# EAGLE board Schematic_328programmer_v0.2 (EAGLE 7.6.0)
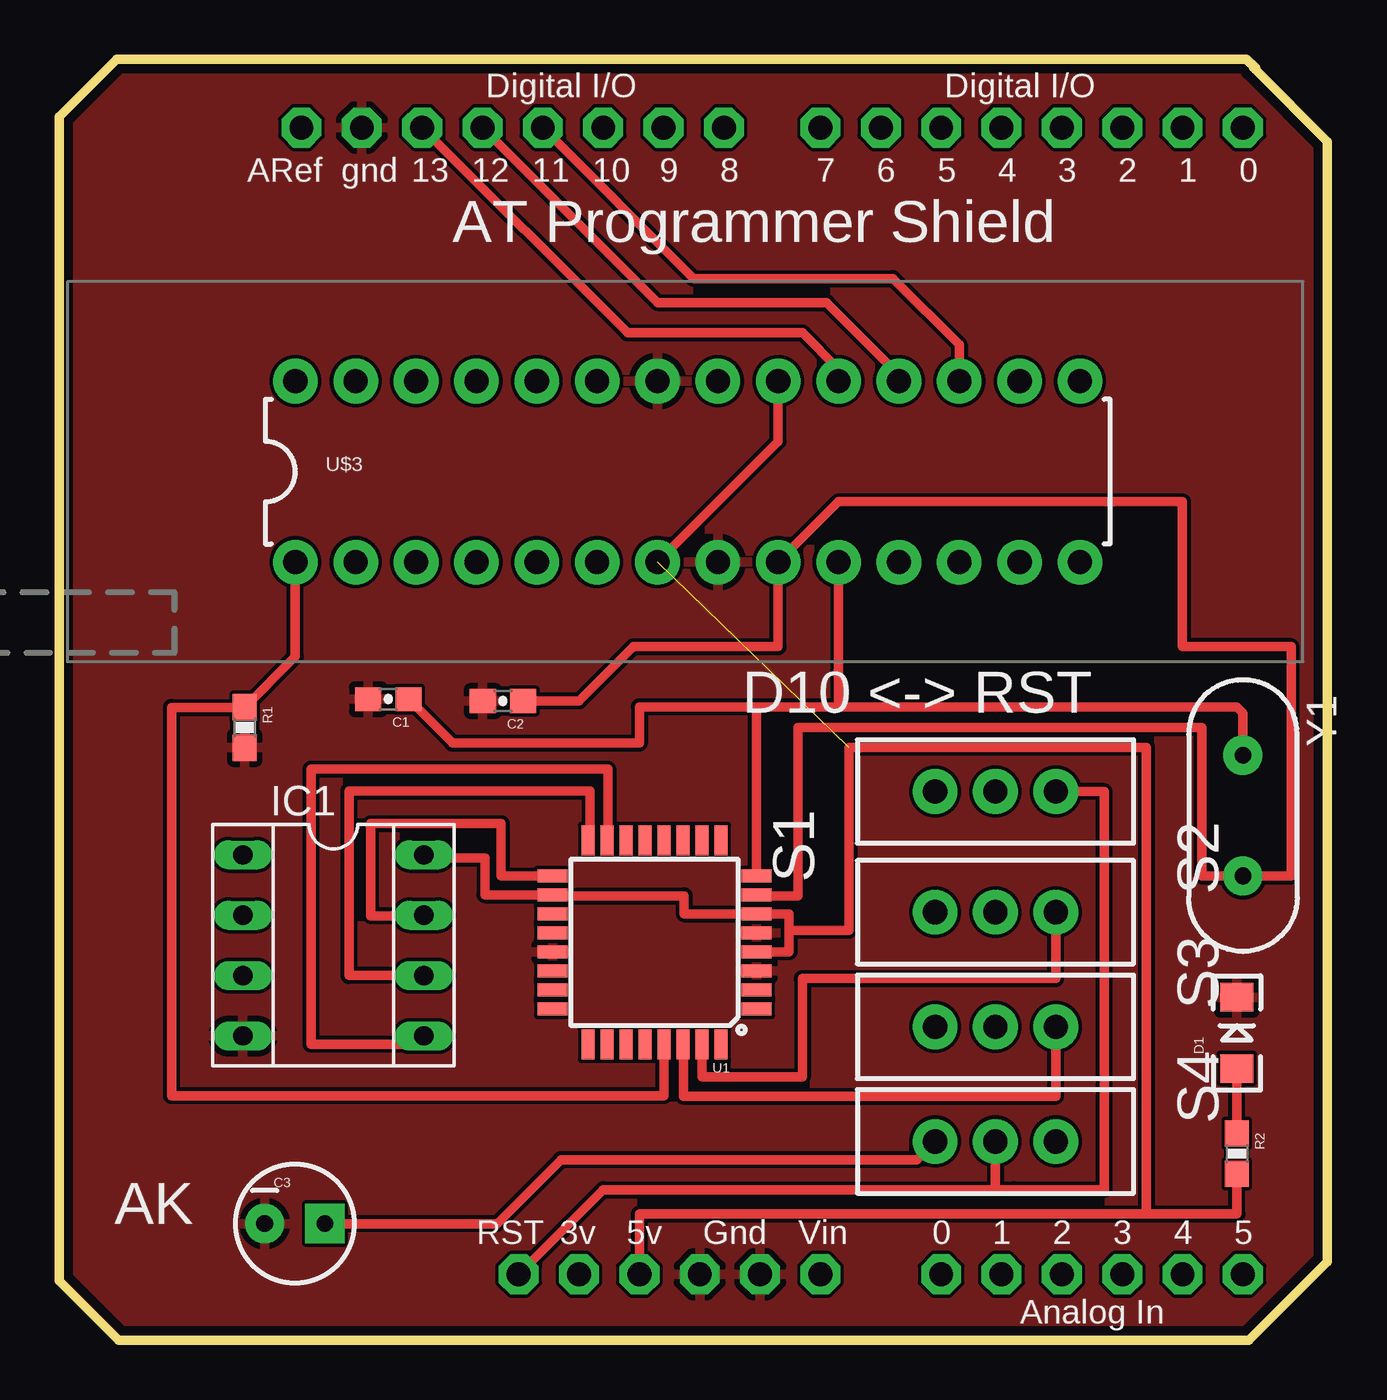
[diagram p0: board, top side]
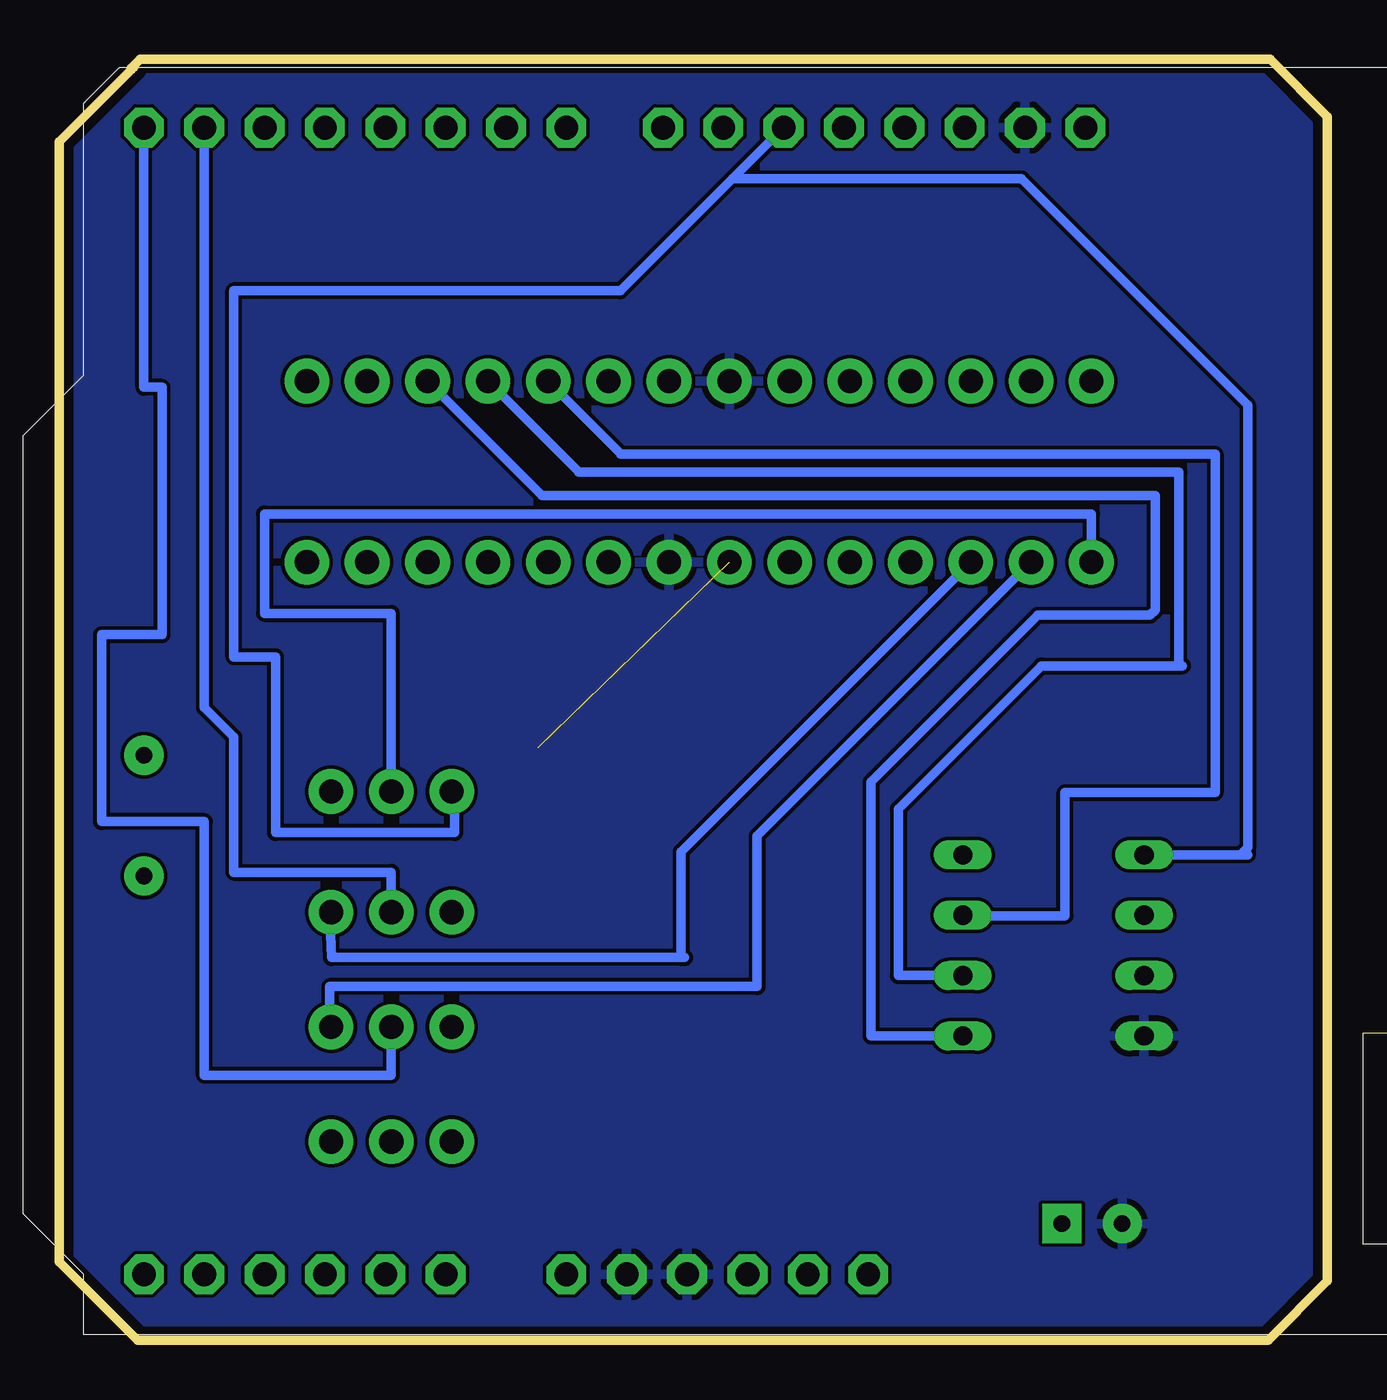
[diagram p1: board, bottom side, seen from below]

Size 53.37 x 53.9 mm. Coordinates in mm from the lower left corner, seen from the top.
Outline: 50.24,53.57 50.34,53.47
Outline: 50.34,53.47 53.37,50.44 53.37,3.3 50.06,0 2.49,0 0,2.49 0,51.49 2.41,53.9 49.96,53.9 50.34,53.52 50.34,53.47
Copper layers (1*16): Top 0.0356mm / dielectric 1.5011mm / Bottom 0.0356mm
Design rules "LaenPCBOrder": minimum track width 6mil, minimum drill 13mil, track to track 6mil, track to pad 6mil, pad to pad 6mil, via to via 6mil, smd to smd 6mil, copper to edge 15mil, drill to drill 6mil, minimum pad ring 7mil, minimum via ring 7mil, stop-mask expansion 3mil, vias tented up to drill 0mil, thermal gap 10mil

## Footprints (pad centres in the part's own frame; a part is rotated, then mirrored left to right if it is on the bottom)
0603-CAP = smd 1.1 x 1: 1 -0.85,0; 2 0.85,0
CPOL-RADIAL-10UF-25V = drill 0.7 pad 1.651 square: 1 1.27,0 | drill 0.7 pad 1.651: 2 -1.27,0
LED-1206 = smd 1.2 x 1.4: A -1.5,0; C 1.5,0
SOCKET-08 = drill 0.813 long: 1 -3.81,-3.81; 2 -1.27,-3.81; 3 1.27,-3.81; 4 3.81,-3.81; 5 3.81,3.81; 6 1.27,3.81; 7 -1.27,3.81; 8 -3.81,3.81
0603-RES = smd 1.1 x 1: 1 -0.85,0; 2 0.85,0
SWITCH-SPDT = drill 1.016 pad 1.88: 1 0,2.54; 2 0,0; 3 0,-2.54
TQFP32-08 = smd 1.27 x 0.559: 1 -4.293,2.8; 2 -4.293,2; 3 -4.293,1.2; 4 -4.293,0.4; 5 -4.293,-0.4; 6 -4.293,-1.2; 7 -4.293,-2; 8 -4.293,-2.8; 17 4.293,-2.8; 18 4.293,-2; 19 4.293,-1.2; 20 4.293,-0.4; 21 4.293,0.4; 22 4.293,1.2; 23 4.293,2; 24 4.293,2.8 | smd 0.559 x 1.27: 9 -2.8,-4.293; 10 -2,-4.293; 11 -1.2,-4.293; 12 -0.4,-4.293; 13 0.4,-4.293; 14 1.2,-4.293; 15 2,-4.293; 16 2.8,-4.293; 25 2.8,4.293; 26 2,4.293; 27 1.2,4.293; 28 0.4,4.293; 29 -0.4,4.293; 30 -1.2,4.293; 31 -2,4.293; 32 -2.8,4.293
ARDUINO-NOHOLE = drill 1 pad 1.676 octagon: 3V 35.56,2.54; 5V 38.1,2.54; A0 50.8,2.54; A1 53.34,2.54; A2 55.88,2.54; A3 58.42,2.54; A4 60.96,2.54; A5 63.5,2.54; AREF 23.876,50.8; D0 63.5,50.8; D1 60.96,50.8; D2 58.42,50.8; D3 55.88,50.8; D4 53.34,50.8; D5 50.8,50.8; D6 48.26,50.8; D7 45.72,50.8; D8 41.656,50.8; D9 39.116,50.8; D10 36.576,50.8; D11 34.036,50.8; D12 31.496,50.8; D13 28.956,50.8; GND 26.416,50.8; GND1 43.18,2.54; GND2 40.64,2.54; RESET 33.02,2.54; VIN 45.72,2.54
DIL28-3-ZIF_SOCKET = drill 1.016 pad 1.88: 1 -16.51,-3.81; 2 -13.97,-3.81; 3 -11.43,-3.81; 4 -8.89,-3.81; 5 -6.35,-3.81; 6 -3.81,-3.81; 7 -1.27,-3.81; 8 1.27,-3.81; 9 3.81,-3.81; 10 6.35,-3.81; 11 8.89,-3.81; 12 11.43,-3.81; 13 13.97,-3.81; 14 16.51,-3.81; 15 16.51,3.81; 16 13.97,3.81; 17 11.43,3.81; 18 8.89,3.81; 19 6.35,3.81; 20 3.81,3.81; 21 1.27,3.81; 22 -1.27,3.81; 23 -3.81,3.81; 24 -6.35,3.81; 25 -8.89,3.81; 26 -11.43,3.81; 27 -13.97,3.81; 28 -16.51,3.81
HC49US = drill 0.7 pad 1.651: 1 -2.54,0; 2 2.54,0

## Placement (x,y rotation side)
C1  22pF  [0603-CAP]  13.84,26.97 180 top
C2  22pF  [0603-CAP]  18.67,26.9 180 top
C3  10uF  [CPOL-RADIAL-10UF-25V]  9.91,4.9 0 top
D1  BLUE  [LED-1206]  49.56,12.93 90 top
IC1  ATTiny85  [SOCKET-08]  11.53,16.61 270 top
R1  10k  [0603-RES]  7.8,25.78 270 top
R2  220 ohm  [0603-RES]  49.56,7.85 270 top
S1  bootloader vs programmer  [SWITCH-SPDT]  39.4,23.09 90 top
S2  txSwitch  [SWITCH-SPDT]  39.4,18.01 270 top
S3  rxSwitch  [SWITCH-SPDT]  39.4,13.18 270 top
S4  ic test switch  [SWITCH-SPDT]  39.4,8.36 270 top
U1  ATMEGA328P_TQFP  [TQFP32-08]  25.04,16.74 180 top
U$1  ARDUINO-NOHOLE  [ARDUINO-NOHOLE]  -13.69,0.23 0 top
U$3  ZIFSOCKET-28-3ZIFFSOCKET-28-3  [DIL28-3-ZIF_SOCKET]  26.44,36.55 0 top
Y1  16mhz  [HC49US]  49.81,22.07 270 top

## Library data of the parts
C1 C2 = SparkFun-Capacitors
C3 = SparkFun-Capacitors; PROD_ID: CAP-08440
D1 = SparkFun-LED; PROD_ID: DIO-09911
IC1 = ic-package
R1 = SparkFun-Passives
R2 = SparkFun-Resistors
S1-S4 = SparkFun-Electromechanical; PROD_ID: SWCH-08261
U1 = SparkFun-DigitalIC; PROD_ID: IC-09069
U$1 = adafruit
U$3 = SparkFun-Connectors
Y1 = SparkFun-FreqCtrl

## Nets
3V: U$1.3V
CAP1: C1.1 U1.8 U$3.10 Y1.1
CAP2: C2.1 U1.7 U$3.9 Y1.2
D10: IC1.1 S1.1 U$1.D10
D11: IC1.5 U1.15 U$1.D11 U$3.17
D12: IC1.6 U1.16 U$1.D12 U$3.18
D13: IC1.7 U1.17 U$1.D13 U$3.19
GND: C1.2 C2.2 C3.2 D1.C IC1.4 R1.2 U1.3 U1.5 U1.21 U$1.GND U$1.GND1 U$1.GND2 U$3.8 U$3.22
N$1: D1.A R2.1
N$2: S3.2 U$1.D0
N$3: S2.2 U$1.D1
N$5: C3.1 S4.3
RESET: S1.3 S4.2 U$1.RESET
RESISTOR: R1.1 S1.2 U1.29 U$3.1
RX: S3.1 U1.30 U$3.2
TX: S2.1 U1.31 U$3.3
VCC: IC1.8 R2.2 U1.4 U1.6 U1.18 U$1.5V U$3.7 U$3.20
VIN: U$1.VIN

## Tracks (layer width: path | path; a pad name or v marks a point on that pad's centre or on a via)
CAP1
  Top 0.406: Y1.1 49.81,26.39 49.56,26.64 32.79,26.64 | 32.79,26.64 29.34,26.64 | 29.34,26.64 24.41,26.64 24.41,25.12 16.55,25.12 C1.1 | U$3.10 32.79,26.64 | U1.8 29.34,26.64
CAP2
  Top 0.406: C2.1 21.87,26.9 24.16,29.18 30.25,29.18 U$3.9 32.79,35.28 47.27,35.28 47.27,29.18 51.84,29.18 51.84,19.53 Y1.2 48.08,19.53 48.08,25.78 31.09,25.78 31.09,18.69 29.34,18.69 U1.7
D10
  Bottom 0.406: U$1.D10 25.04,48.87 | 25.04,48.87 29.76,44.16 46.02,44.16 46.02,28.75 44.27,28.75 44.27,21.36 36.73,21.36 36.73,23.09 S1.1 | 3.35,20.42 3.66,20.42 | 3.66,20.42 IC1.1 | 25.04,48.87 12.88,48.87 3.35,39.34 3.35,20.73 3.66,20.42
D11
  Top 0.406: U$1.D11 26.7,44.68 35.08,44.68 37.87,41.88 U$3.17 | IC1.5 15.34,12.45 10.59,12.45 10.59,24.03 23.09,24.03 23.09,21.03 U1.15
  Bottom 0.406: U$3.17 33.05,35.53 7.24,35.53 7.24,30.73 7.47,30.51 12.19,30.51 19.2,23.49 19.2,12.8 IC1.5
D12
  Top 0.406: U$1.D12 25.17,43.66 32.28,43.66 35.33,40.61 U$3.18 | IC1.6 12.19,15.34 12.19,23.11 22.33,23.11 22.33,21.03 U1.16
  Bottom 0.406: U$3.18 31.52,36.55 31.52,36.53 6.25,36.53 6.25,28.52 6.1,28.37 12.04,28.37 18.06,22.35 18.06,15.34 IC1.6
D13
  Top 0.406: U$1.D13 23.9,42.39 31.27,42.39 32.79,40.87 U$3.19 | IC1.7 15.34,17.86 | 15.34,17.78 15.34,17.86 | 15.34,17.86 13.11,17.86 13.11,21.74 18.59,21.74 18.59,19.54 U1.17
  Bottom 0.406: U$3.19 29.74,37.31 29.74,37.29 4.72,37.29 4.72,23.04 11.05,23.04 11.05,17.86 15.34,17.86 IC1.7
GND
  pour Bottom: -23.85,80.24 -23.85,-4.85 82.83,-4.85 82.83,80.24
  pour Top: -25.12,81.51 -25.12,-3.58 84.1,-3.58 84.1,-2.31 84.1,82.78 -25.12,82.78
N$1
  Top 0.406: R2.1 D1.A
N$2
  Bottom 0.406: S3.2 39.4,11.15 47.27,11.15 47.27,21.82 51.59,21.82 51.59,29.69 49.05,29.69 49.05,40.11 49.81,40.11 U$1.D0
N$3
  Bottom 0.406: 47.27,50.77 U$1.D1 47.27,26.62 46.02,25.37 46.02,19.68 39.4,19.68 S2.2
N$5
  Top 0.406: S4.3 36.09,7.59 21.11,7.59 18.42,4.9 C3.1
RESET
  Top 0.406: 39.4,6.32 40.16,6.32 43.97,6.32 43.97,23.09 S1.3 | S4.2 39.4,6.32 | 39.4,6.32 39.14,6.32 | U$1.RESET 22.89,6.32 39.4,6.32
RESISTOR
  Top 0.406: U$3.1 9.93,28.76 R1.1 4.72,26.63 4.72,10.29 25.44,10.29 U1.29
  Bottom 0.406: U$3.1 9.93,34.77 44.73,34.77 44.73,30.58 39.4,30.58 S1.2 39.4,23.11 39.7,23.11
RX
  Top 0.406: U1.30 26.26,12.45 26.26,10.26 41.94,10.26 S3.1
  Bottom 0.406: U$3.2 24,21.21 24,14.88 41.99,14.88 41.99,13.18 S3.1
TX
  Top 0.406: S2.1 41.94,15.21 31.27,15.21 31.27,11.07 27.04,11.07 U1.31
  Bottom 0.406: U$3.3 27.2,20.55 27.2,16.1 | 27.05,16.1 27.2,16.1 | 27.2,16.1 41.91,16.1 41.99,18.01 S2.1
VCC  (1 unrouted)
  Top 0.406: U$1.5V 24.41,5.31 45.75,5.31 | 45.75,5.31 45.75,24.94 33.22,24.94 33.22,17.25 30.71,17.25 | 45.75,5.31 49.56,5.31 R2.2 | U$3.7 30.25,37.82 U$3.20 | 30.71,17.25 30.71,17.93 U1.6 26.29,17.94 26.29,18.69 20.75,18.69 U1.18 17.91,18.74 17.91,20.29 15.34,20.29 IC1.8 | 30.71,17.25 30.71,16.34 U1.4

## Text on the board
tPlace: AT Programmer Shield | D10 <-> RST | AK